# Altium PCB PCB1.PcbDoc
Units mm, origin at the board's own origin, x right, y up, seen from the top; angles counter-clockwise.
Board outline 99.19 x 69.85 mm, 2 copper layers (Top Layer, Bottom Layer); 73 components, 41 nets, 222 pads, 45 vias.
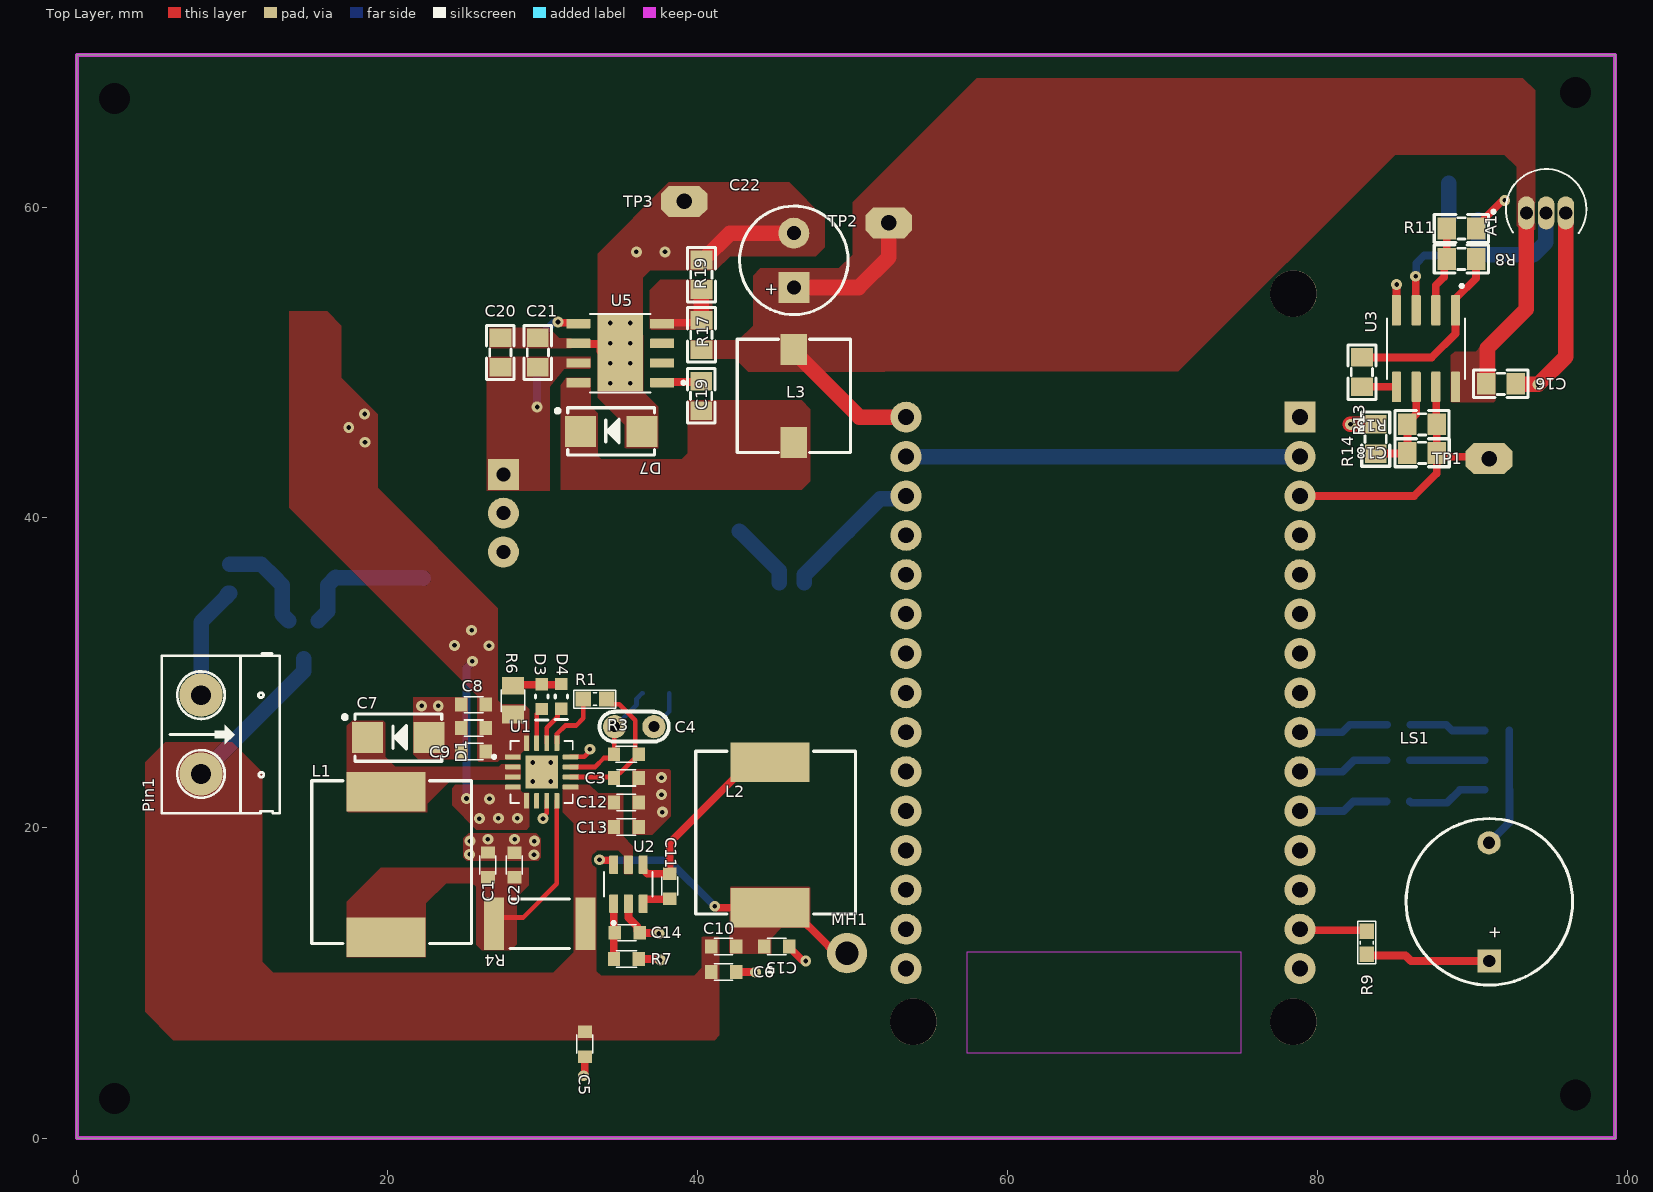
[diagram p0: Top Layer view]
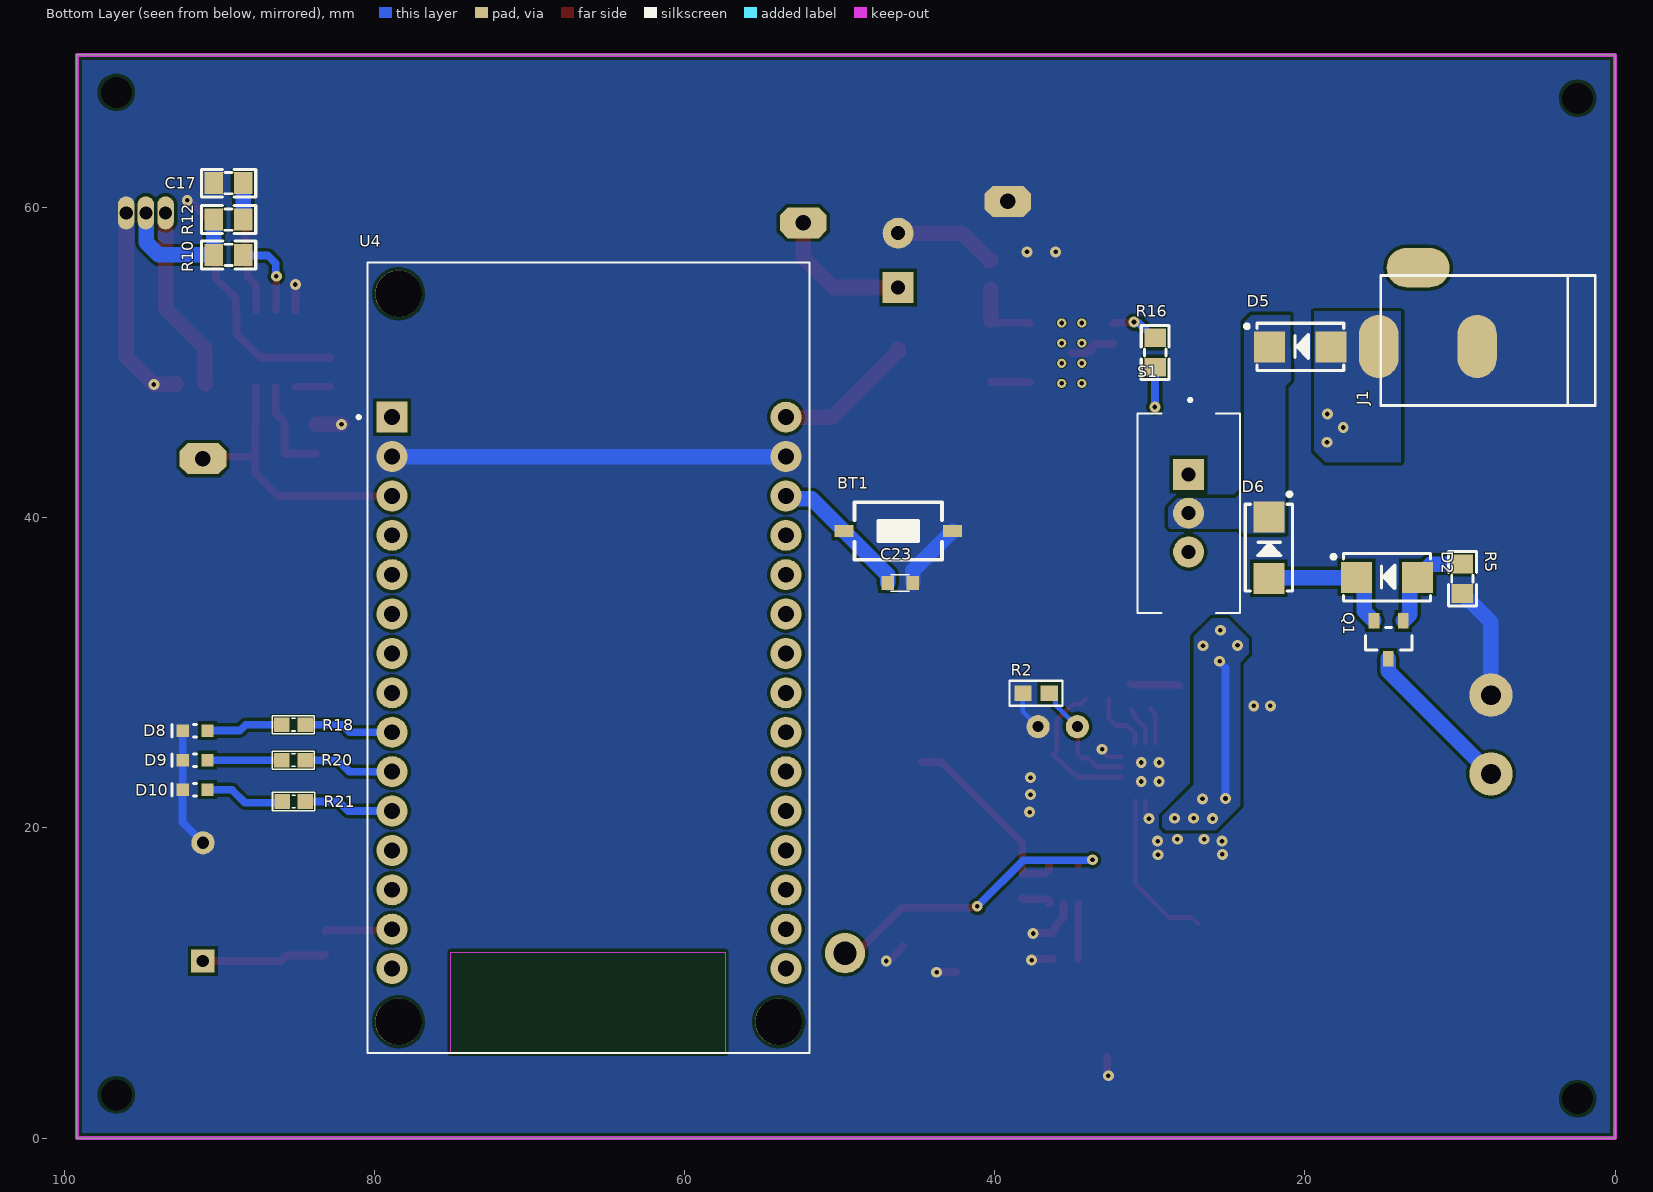
[diagram p1: Bottom Layer view, seen from below]
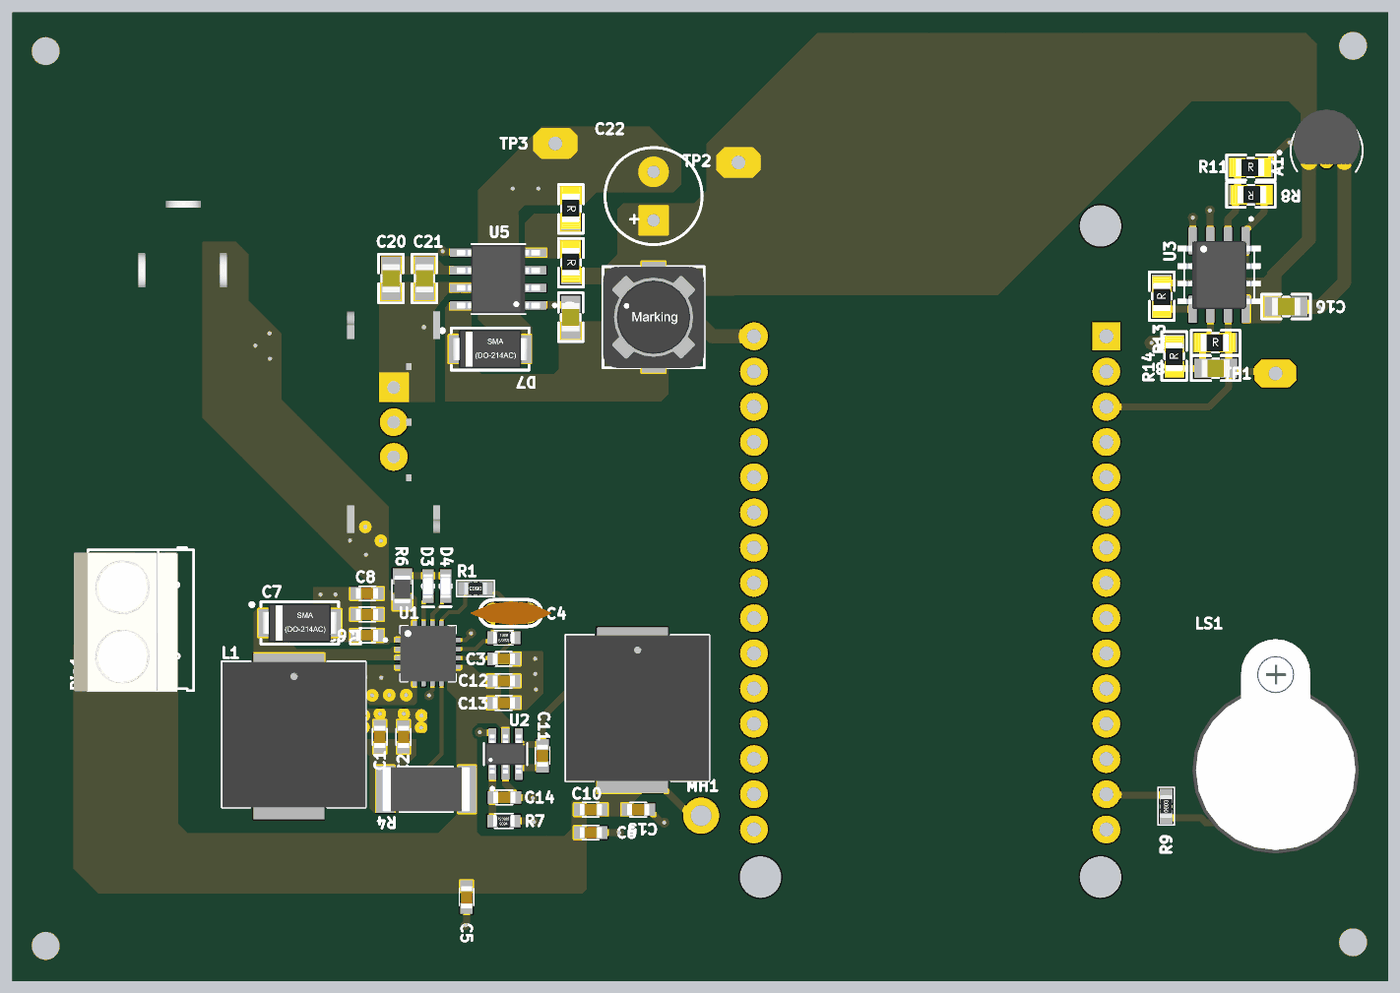
[diagram p2: 3D render of the assembled board from above, using the file's embedded part models]
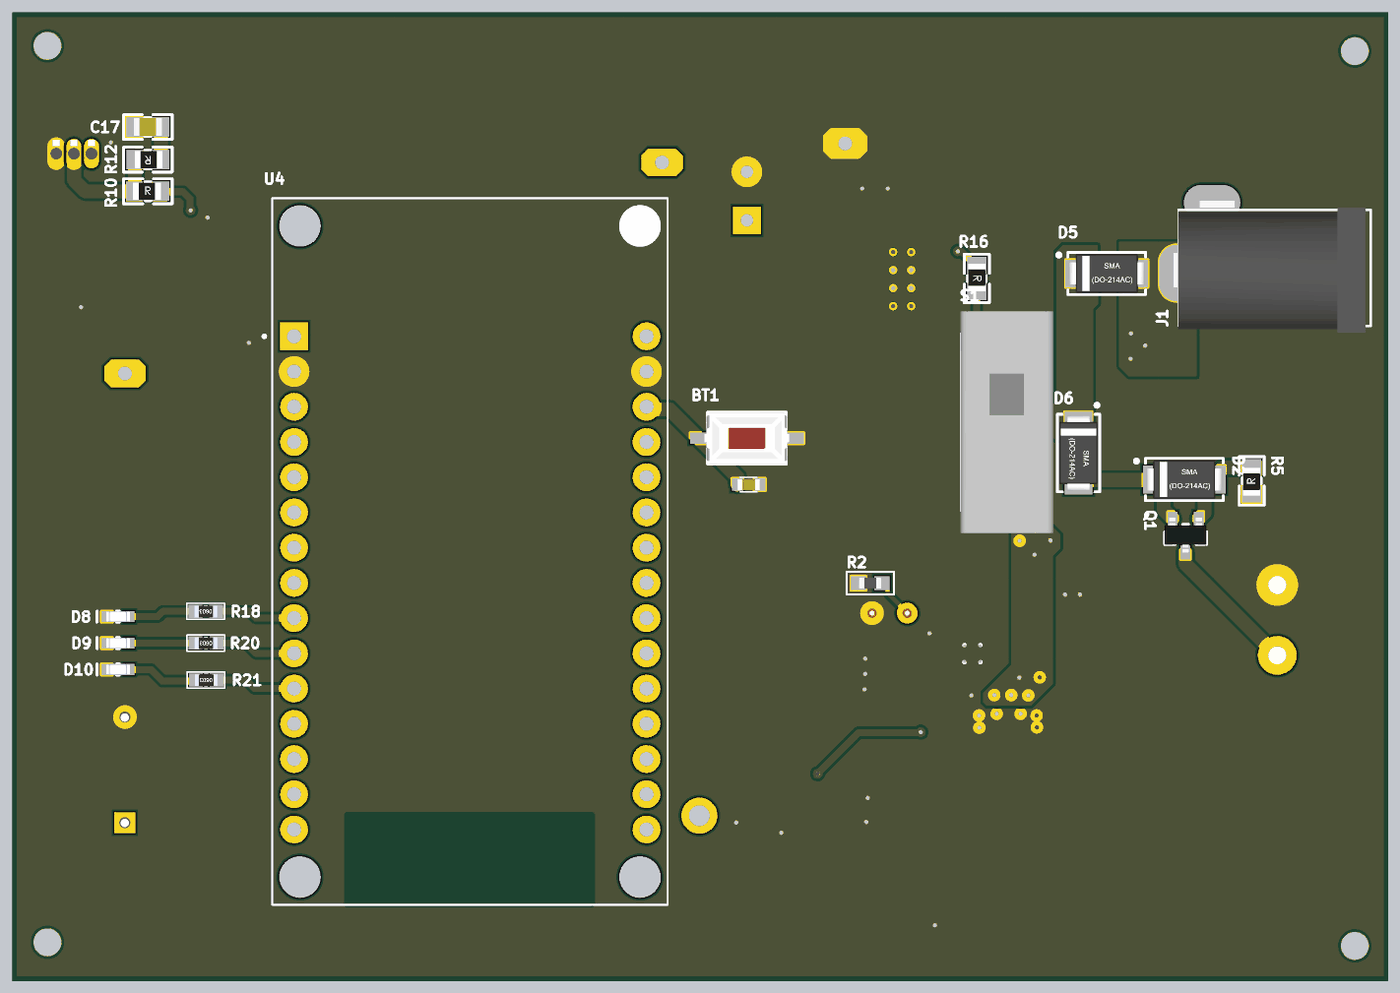
[diagram p3: 3D render of the assembled board from below, using the file's embedded part models]

## Layer stack, top to bottom
Top Solder: solder mask 0.0102, Solder Resist, Dk 3.5
Top Layer: signal copper 0.0356
Dielectric 1: dielectric 0.32, FR-4, Dk 4.8
Bottom Layer: signal copper 0.0356
Bottom Solder: solder mask 0.0102, Solder Resist, Dk 3.5

## Board outline
0,0 0,69.85 99.187,69.85 99.187,0

## Design rules (kind name [scope] priority, off if disabled: settings)
Clearance [All] p1: gap=0.2 ignorepadtopadclearanceinfootprint=TRUE
HoleSize [All] p1: absolutevalues=TRUE maxlimit=5 minlimit=0.3 maxpercent=80.000 minpercent=20.000
HoleToHoleClearance [All] p1: gap=0.1 allowstackedmicrovias=TRUE
MinimumSolderMaskSliver [All] p1: minsoldermaskwidth=0.1
PolygonConnect [All] p1: connectstyle=Direct reliefconductorwidth=0.254 reliefentries=4 polygonreliefangle="90 Angle" airgapwidth=0.254
RoutingVias [All] p1: holewidth=0.3 width=0.7 viastyle="Through Hole" minholewidth=0.1 minwidth=0.7 maxholewidth=1 maxwidth=1.27
SilkToSilkClearance [All] p1: silktosilkclearance=0
SilkToSolderMaskClearance [IsPad] p1: minsilkscreentomaskgap=0 clearancetoexposedcopper=TRUE
SolderMaskExpansion [All] p1: expansion=0.102 istentingtop=FALSE
Width [All] p1: maxlimit=1 minlimit=0.3 preferedwidth=0.5
25 further rules are at their usual default settings.

## Components (designator, comment, footprint, x,y, rotation, side; value= is the part's Value field where it differs from the comment)
A1 "LM35DZ" TO92127P521H735-3 94.742,60.442 r0 top
BT1 "Nut Nhan 2 Chan SMD 3x6x2.5" "Nut Nhan 2 Chan SMD 3x6x2.5" 46.225,39.15 r0 bottom
C1 "100nF" C0603C/1608MM 26.493,17.618 r270 top
C2 "10uF" C0603C/1608MM 28.204,17.612 r270 top
C3 "100nF" C0603C/1608MM 35.433,23.231 r180 top
C4 "203" "tu gom" 35.941,26.533 r0 top
C5 "100nF" C0603C/1608MM 32.75,6.05 r90 top
C6 "10uF" C0603C/1608MM 41.704,10.71 r180 top
C7 "10uF" C0603C/1608MM 25.575,27.95 r0 top
C8 "1uF" C0603C/1608MM 25.575,26.438 r0 top
C9 "100nF" C0603C/1608MM 25.575,24.925 r0 top
C10 "10uF" C0603C/1608MM 41.704,12.361 r180 top
C11 "10nF" C0603C/1608MM 38.227,16.246 r90 top
C12 "10uF" C0603C/1608MM 35.433,21.64 r180 top
C13 "10uF" C0603C/1608MM 35.433,20.056 r180 top
C14 "1nF" C0603C/1608MM 35.481,13.245 r180 top
C15 "10uF" C0603C/1608MM 45.133,12.361 r180 top
C16 "0.1uF" "tu 0805" 91.821,48.641 r0 top
C17 "0.2uF" "tu 0805" 89.408,61.585 r0 bottom
C18 "0.2uF" "tu 0805" 86.741,44.186 r0 top
C19 "0.01uF" "tu 0805" 40.259,47.869 r270 top
C20 "1uF" "tu 0805" 27.305,50.663 r90 top
C21 "10uF" "tu 0805" 29.718,50.663 r90 top
C22 "220uF/63V" CAP_ALUM_D070_S35_H115 46.228,56.604 r90 top
C23 "100nF" C0603C/1608MM 46.101,35.804 r0 bottom
D1 "SS34" "SMA (DO-214AC)" 20.825,25.725 r180 top
D2 "SS34" "SMA (DO-214AC)" 14.605,36.068 r0 bottom
D3 "Orange" LED_0603_0m65 29.975,28.475 r90 top
D4 "Orange" LED_0603_0m65 31.242,28.484 r90 top
D5 "SS34" "SMA (DO-214AC)" 20.193,50.927 r0 bottom
D6 "SS34" "SMA (DO-214AC)" 22.425,37.975 r90 bottom
D7 "SS34" "SMA (DO-214AC)" 34.55,45.475 r180 top
D8 "Orange" LED_0603_0m65 91.567,26.279 r180 bottom
D9 "Orange" LED_0603_0m65 91.567,24.374 r180 bottom
D10 "Orange" LED_0603_0m65 91.567,22.469 r180 bottom
J1 "DCIN" DC0_SMD 12.065,53.594 r0 bottom
L1 "22uH" "IND 22uH" 19.939,17.643 r270 top
L2 "1uH" "IND 22uH" 44.704,19.548 r270 top
L3 "15uH" L-SMD-M-7.3x4.5 46.228,47.869 r180 top
LS1 "Coi Chip Speaker" "Coi Chip Speacker" 91.072,11.42 r90 top
MH1 "MH_3MMD_1.5MMH" MH_3MMD_1.5MMH 49.657,11.928 r90 top
Pin1 "Header 2" HED2 8.001,28.565 r270 top
Q1 "AO3401" "SOT 23" 14.605,32.131 r270 bottom
R1 "10K" "tro smd 0603" 33.401,28.311 r180 top
R2 "10K" "RESC-0603 (1608)" 37.338,28.692 r0 bottom
R3 "5.6K" R0603B/1608MM 35.433,24.755 r0 top
R4 "0.1R" R2512B/6332MM 29.845,13.833 r180 top
R5 "3.24K" "tro smd 0805" 9.906,36.068 r90 bottom
R6 "1K" R0805B/2012MM 28.125,28.25 r270 top
R7 "50k" R0603B/1608MM 35.433,11.547 r180 top
R8 "20K" "tro smd 0805" 89.281,56.632 r180 top
R9 "1k" "tro smd 0603" 83.175,12.6 r90 top
R10 "20K" "tro smd 0805" 89.408,57.013 r180 bottom
R11 "20K" "tro smd 0805" 89.281,58.725 r0 top
R12 "75R" "tro smd 0805" 89.408,59.172 r0 bottom
R13 "20K" "tro smd 0805" 82.804,49.393 r90 top
R14 "20K" "tro smd 0805" 83.693,45.075 r90 top
R15 "40K" "tro smd 0805" 86.741,46.091 r0 top
R16 "10k" "tro smd 0805" 29.591,50.663 r270 bottom
R17 "10k" "tro smd 0805" 40.335,51.806 r270 top
R18 "1K" "tro smd 0603" 85.229,26.66 r0 bottom
R19 "3.24k" "tro smd 0805" 40.335,55.681 r270 top
R20 "1K" "tro smd 0603" 85.217,24.374 r0 bottom
R21 "1K" "tro smd 0603" 85.205,21.707 r0 bottom
S1 "500SSP1S2M2QEA" SW_500SSP1S2M2QEA 27.5,40.3 r270 bottom
TP1 "Testpoint 2" "TP - 2" 91.059,43.815 r0 top
TP2 "Testpoint 2" "TP - 2" 52.35,59.025 r0 top
TP3 "Testpoint 2" "TP - 2" 39.15,60.4 r0 top
U1 "TP5100" QFN65P400X400X90-17N 29.972,23.612 r0 top
U2 "ETA3000" ETA300 35.56,16.373 r90 top
U3 "LM358DRE4" SOIC127P599X175-8N 86.995,50.917 r270 top
U4 "ESP32-DEVKIT-V1" MODULE_ESP32_DEVKIT_V1 66.167,30.978 r180 bottom
U5 "TPS5430DDAR" CONV_TPS5430DDAR 35.037,50.618 r180 top

## Footprints (in the part's own frame and the unit in brackets; to place one, negate y for a bottom-side part, rotate by r counter-clockwise, add the part's x,y. Pads: shape width x height; smd on the part's side, far side on the other; paste and mask are expansions set on the pad)
C0603C/1608MM [mm] "Chip Capacitor, 2-Leads, Body 1.6x0.8mm, IPC High Density"
  rect 0.8x0.9 smd: 1(-0.8,0) 2(0.8,0)
  silkscreen extent -0.59,-0.53 0.61,0.53, body extent -0.8,-0.4 0.8,0.4, height 0.9
CAP_ALUM_D070_S35_H115 [mm]
  rect 2x2 hole 0.9: 1(-1.75,0)
  round 2 hole 0.9: 2(1.75,0)
  silkscreen extent -3.5,-3.5 3.5,3.5, body extent -4.25,-4.25 4.25,4.25, height 13
"Coi Chip Speacker" [mm]
  rect 1.5x1.5 hole 0.8: 1(0,0)
  round 1.5 hole 0.8: 2(7.62,0.013)
  silkscreen extent -1.55,-5.38 9.18,5.36, body extent -2.22,-6 13.24,6, height 4.5
CONV_TPS5430DDAR [mm]
  rrect10% 1.55x0.6 smd mask+0: 1(-2.7,1.905) 2(-2.7,0.635) 3(-2.7,-0.635) 4(-2.7,-1.905) 5(2.7,-1.905) 6(2.7,-0.635) 7(2.7,0.635) 8(2.7,1.905)
  rect 2.95x4.9 smd paste-3 mask+0: 9(0,0)
  round 0.6 hole 0.3 mask+0: 10(-0.65,1.95) 11(0.65,1.95) 12(-0.65,0.65) 13(0.65,0.65) 14(-0.65,-0.65) 15(0.65,-0.65) 16(-0.65,-1.95) 17(0.65,-1.95)
  silkscreen extent -4.17,-2.52 1.95,2.52, body extent -3,-2.45 3,2.45, height 1.7
DC0_SMD [mil] "Jac DC input"
  oval 100x160 smd: 1(125,100) 2(-125,100)
  oval 160x100 smd: 3(25,-100)
  silkscreen extent -425,-80 120,250, body extent -410,-105 134,269, height 434
ETA300 [mm]
  rrect25% 1.21x0.58 smd: 1(-1.255,0.95) 2(-1.255,0) 3(-1.255,-0.95) 4(1.255,-0.95) 5(1.255,0) 6(1.255,0.95)
  silkscreen extent -2.6,-1.56 0.8,1.56, body extent -1.4,-1.45 1.4,1.45, height 1.45
HED2 [mil]
  round 110 hole 50: 1(0,0) 2(200,0)
  silkscreen extent -106,-100 300,200, body extent -92,-140 302,155, height 394
"IND 22uH" [mm]
  rect 2.54x5.1 smd: 1(-4.7,0) 2(4.7,0)
  silkscreen extent -5.4,-4.8 5.1,5.5, body extent -5.37,-4.77 5.12,5.54, height 5.01
L-SMD-M-7.3x4.5 [mm]
  rect 1.7x2 smd: 1(0,3) 2(0,-3)
  silkscreen extent -3.65,-3.65 3.65,3.65, body extent -3.65,-3.65 3.65,3.65, height 4.05
LED_0603_0m65 [mm]
  rect 0.8x0.8 smd: 1(0.8,0) 2(-0.8,0)
  silkscreen extent -1.5,-0.4 0.1,0.4, body extent -0.85,-0.4 0.85,0.4, height 0.66
MH_3MMD_1.5MMH [mm]
  round 2.6 hole 1.5: 1(0,0)
MODULE_ESP32_DEVKIT_V1 [mm]
  rect 2x2 / inner round 2 / far side rect 2x2 hole 1.02: 1(-12.7,15.515)
  round 2 hole 1.02: 2(-12.7,12.975) 3(-12.7,10.435) 4(-12.7,7.895) 5(-12.7,5.355) 6(-12.7,2.815) 7(-12.7,0.275) 8(-12.7,-2.265) 9(-12.7,-4.805) 10(-12.7,-7.345) 11(-12.7,-9.885) 12(-12.7,-12.425) 13(-12.7,-14.965) 14(-12.7,-17.505) 15(-12.7,-20.045) 16(12.7,-20.045) 17(12.7,-17.505) 18(12.7,-14.965) 19(12.7,-12.425) 20(12.7,-9.885) 21(12.7,-7.345) 22(12.7,-4.805) 23(12.7,-2.265) 24(12.7,0.275) 25(12.7,2.815) 26(12.7,5.355) 27(12.7,7.895) 28(12.7,10.435) 29(12.7,12.975) 30(12.7,15.515)
  round 3 hole 3 unplated: ""(-12.28,-23.475) ""(-12.28,23.475) ""(12.23,-23.475)
  round 3 on Bottom Overlay: ""(12.23,23.475)
  Keep-Out Layer region: 8.78,-25.475 -8.91,-25.475 -8.91,-18.985 8.78,-18.985
  Keep-Out Layer region: 8.78,-25.475 -8.91,-25.475 -8.91,-18.985 8.78,-18.985
  silkscreen extent -14.95,-25.48 14.23,25.48
"Nut Nhan 2 Chan SMD 3x6x2.5" [mm] "Switch SMD type"
  rect 1.2x0.8 smd: 1(-3.5,0) 2(3.5,0)
  silkscreen extent -2.82,-1.85 2.82,1.85, body extent -3.05,-1.85 3.05,1.85, height 2.5
QFN65P400X400X90-17N [mm]
  rrect25% 1.01x0.32 smd: 1(-1.86,0.975) 2(-1.86,0.325) 3(-1.86,-0.325) 4(-1.86,-0.975) 9(1.86,-0.975) 10(1.86,-0.325) 11(1.86,0.325) 12(1.86,0.975)
  rrect25% 0.32x1.01 smd: 5(-0.975,-1.86) 6(-0.325,-1.86) 7(0.325,-1.86) 8(0.975,-1.86) 13(0.975,1.86) 14(0.325,1.86) 15(-0.325,1.86) 16(-0.975,1.86)
  rect 2.1x2.1 smd paste-0.39: 17(0,0)
  silkscreen extent -3.17,-2 2,2, body extent -2,-2 2,2, height 0.9
R0603B/1608MM [mm] "Chip Resistor, 2-Leads, Body 1.6x0.8mm, IPC High Density"
  rect 0.8x0.9 smd: 1(-0.8,0) 2(0.8,0)
  silkscreen extent -0.67,-0.53 0.67,0.53, body extent -0.77,-0.42 0.78,0.43, height 0.46
R0805B/2012MM [mm] "Chip Resistor, 2-Leads, Body 2.0x1.3mm, IPC Medium Density"
  rect 1.15x1.4 smd: 1(-0.925,0) 2(0.925,0)
  silkscreen extent -0.67,-0.75 0.76,0.75, body extent -1,-0.6 1,0.6, height 0.6
R2512B/6332MM [mm] "Chip Resistor, 2-Leads, Body 6.3x3.2mm, IPC Medium Density"
  rect 1.3x3.4 smd: 1(-2.95,0) 2(2.95,0)
  silkscreen extent -1.9,-1.6 1.9,1.6, body extent -3.15,-1.6 3.15,1.6, height 0.7
"RESC-0603 (1608)" [mm] "Resistor, Chip; 1.60 mm L X 0.80 mm W X 0.50 mm H body"
  rect 1.1x1 smd mask+0.1: 1(-0.85,0) 2(0.85,0)
  silkscreen extent -1.71,-0.81 1.71,0.81, body extent -0.8,-0.4 0.8,0.4, height 0.5
"SMA (DO-214AC)" [mm] "Molded Diode, 2-Leads, Body 5.3x2.8mm, IPC Medium Density"
  rect 2x2 smd: 1(-1.875,-0.1) 2(2.075,-0.1)
  silkscreen extent -2.7,-1.62 3.67,1.42, body extent -2.65,-1.5 2.85,1.3, height 2.6
SOIC127P599X175-8N [mm]
  rrect25% 1.97x0.6 smd: 1(-2.47,1.905) 2(-2.47,0.635) 3(-2.47,-0.635) 4(-2.47,-1.905) 5(2.47,-1.905) 6(2.47,-0.635) 7(2.47,0.635) 8(2.47,1.905)
  silkscreen extent -4.14,-2.52 1.95,2.52, body extent -2.45,-3 2.45,3, height 1.75
"SOT 23" [mm]
  rect 1x0.7 smd: 1(-1.225,0.945) 2(-1.22,-0.945) 3(1.225,-0.025)
  silkscreen extent -0.8,-1.5 0.65,1.5, body extent -1.28,-1.51 1.22,1.49, height 1.06
SW_500SSP1S2M2QEA [mm]
  rect 2x2 hole 0.9: 1(-2.5,0)
  round 2 hole 0.9: 2(0,0) 3(2.5,0)
  silkscreen extent -7.4,-3.3 6.43,3.3, body extent -8,-3.35 8,3.35, height 11.5
TO92127P521H735-3 [mm]
  oval 1.07x2.14 hole 0.85: 1(-1.27,-0.775) 2(0,-0.775) 3(1.27,-0.775)
  silkscreen extent -3.5,-2.08 2.6,2.04, body extent -2.4,-1.53 2.4,2.4, height 7.74
"TP - 2" [mm]
  oct 3x2 hole 1: 1(0,0)
"tro smd 0603" [mm] "Chip Capacitor, 2-Leads, Body 1,60x0,80mm, IPC Medium Density"
  rect 1x0.95 smd mask+0.076: 1(-0.75,0) 2(0.75,0)
  silkscreen extent -1.35,-0.58 1.37,0.58, body extent -0.82,-0.42 0.82,0.43, height 0.44
"tro smd 0805" [mm]
  rect 1.2x1.4 smd: 1(-0.946,-0.061) 2(0.954,-0.061)
  silkscreen extent -1.75,-0.97 1.75,0.84, body extent -1.56,-0.76 1.44,0.64, height 0.53
"tu 0805" [mm] "Compoment SMD 80x50mil"
  rect 1.2x1.4 smd: 1(-0.946,-0.003) 2(0.954,-0.003)
  silkscreen extent -1.75,-0.89 1.75,0.89, body extent -1.01,-0.64 1.01,0.63, height 0.61
"tu gom" [mm] "Tu gom mini"
  round 1.5 hole 0.7: 1(-1.27,0) 2(1.27,0)
  silkscreen extent -2.25,-0.97 2.22,0.97, body extent -2.92,-0.85 2.92,0.85, height 6.12

## Part data
A1: library part LM35DZ/NOPB, "Temperature Sensor Analog, Local 0Â°C ~ 100Â°C 10mV/Â°C TO-92-3", Package="E-PKG AXIAL-LEADED-2 ON Semiconductor", Availability="In Stock", Check_prices=https://www.snapeda.com/parts/LM35DZ/Texas+Instruments/view-part/?ref=eda, MF="Texas Instruments", MP=LM35DZ, Price=None, Purchase-URL=https://pricing.snapeda.com/search/part/LM35DZ/?ref=eda, SnapEDA_Link=https://www.snapeda.com/parts/LM35DZ/Texas+Instruments/view-part/?ref=snap
C1 C3 C5 C9 C23: library part "CAP CER 100nF 16V 5% X7R 0603", "Cap Ceramic 0.1uF 16V X7R 5% SMD 0603 125C T/R", Case Code (Imperial)=0603, Case Code (Metric)=1608, Dielectric=X7R, Manufacturer=Yageo, Manufacturer Part Number=CC0603JRX7R7BB104, Max Operating Temperature=125°C, Min Operating Temperature=-55°C, Supplier Part Number 1=311-1776-1-ND, Tolerance=5%, Voltage Rating=16V, Capacitance=100nF, Case/Package=0603, ComponentLink1Description=https://www.verical.com/server-webapp/html/getDatasheet?partID=403543&src-supplier=Verical, ComponentLink1URL=https://www.verical.com/server-webapp/html/getDatasheet?partID=403543&src-supplier=Verical, Depth=0.8mm, Halogen Free="Halogen Free", Lead Free="Lead Free", Length=1.6mm, Mount="Surface Mount", Number of Pins=2, Packaging="Tape and Reel", Pricing 1="1=0.1, 10=0.077, 50=0.042, 100=0.0343, 500=0.02448, 1000=0.01923 (USD)", Radiation Hardening=No, RoHS Compliant=Yes, Series=CC, Stock 1=333951, Supplier 1=Digi-Key, Thickness=0.035inch, Voltage Rating (DC)=16V, Width=0.031inch
C2 C6 C7 C8 C10 C12 C13 C15: library part "CAP CER 10uF 16V X7R 0603", "CAP CER 0603 10uF 16V X7R 10%"
C4: library part "Tu gom 203 50V", "Cắm", Chung_Loai=Cắm, Don_Vi=Con, Ma_Hang=MH007482, So_Chan=2, Ten_Linh_Kien="Tụ gốm 203 -20nF 50V"
C11: library part "CAP CER 10nF 16V X7R 0603", "CAP CER 0603 10NF 16V X7R 10%", Case Code (Imperial)=0603, Case Code (Metric)=1608, Manufacturer=KEMET, Manufacturer Part Number=C0603C103K4RECAUTO, Max Operating Temperature=125°C, Min Operating Temperature=-55°C, Ratings=AEC-Q200, Supplier Part Number 1=399-17880-1-ND, Tolerance=10%, Voltage Rating=16V, Capacitance=10nF, Case/Package=0603, ComponentLink1Description=https://api.kemet.com/component-edge/download/datasheet/C0603C103K4RECAUTO.pdf?src-supplier=Digi-Key, ComponentLink1URL=https://api.kemet.com/component-edge/download/datasheet/C0603C103K4RECAUTO.pdf?src-supplier=Digi-Key, Mount="Surface Mount", Packaging="Tape and Reel", Pricing 1="1=0.15, 10=0.11, 50=0.0624, 100=0.0517, 500=0.03624, 1000=0.03 (USD)", RoHS Compliant=Yes, Stock 1=50866, Supplier 1=Digi-Key
C14: library part "CAP CER 1nF 16V 5% X7R 0603", "1000 pF ±5% 16V Ceramic Capacitor X7R 0603 (1608 Metric)", Case Code (Imperial)=0603, Case Code (Metric)=1608, Manufacturer=KEMET, Manufacturer Part Number=C0603X102J4RECAUTO, Max Operating Temperature=125°C, Min Operating Temperature=-55°C, Ratings=AEC-Q200, Supplier Part Number 1=399-17840-1-ND, Tolerance=5%, Voltage Rating=16V, Capacitance=1nF, Case/Package=0603, ComponentLink1Description=http://www.farnell.com/datasheets/2743686.pdf?src-supplier=Newark, ComponentLink1URL=http://www.farnell.com/datasheets/2743686.pdf?src-supplier=Newark, ComponentLink2Description=http://www.farnell.com/datasheets/2743686.pdf?src-supplier=Farnell, ComponentLink2URL=http://www.farnell.com/datasheets/2743686.pdf?src-supplier=Farnell, ComponentLink3Description=https://api.kemet.com/component-edge/download/datasheet/C0603X102J4RECAUTO.pdf?src-supplier=Digi-Key, ComponentLink3URL=https://api.kemet.com/component-edge/download/datasheet/C0603X102J4RECAUTO.pdf?src-supplier=Digi-Key, Features="Soft Termination", Mount="Surface Mount", Packaging="Tape and Reel", Pricing 1="1=0.22, 10=0.147, 50=0.0882, 100=0.0744, 500=0.0509, 1000=0.04503 (USD)", RoHS Compliant=Yes, Stock 1=2638, Supplier 1=Digi-Key
C16 C17 C18 C19 C20 C21: library part "Tu 0805 10pF 50V 10%", "Dán", Chung_Loai=Dán, Don_Vi=Con, Ma_Hang=MH004554, So_Chan=2, Ten_Linh_Kien="Tụ 0805 10P 10% 50V"
C22: library part "CAP ALUM 47UF 20% 63V RADIAL", "Cap Aluminum 47uF 63V 20% (8 X 11.5mm) Radial 3.5mm 405mA 3000 hr 105C Ammo Pack", Capacitance=47uF, Case/Package=Radial, Dielectric Material=Aluminium, ESR (Equivalent Series Resistance)=684mR, Manufacturer=Nichicon, Manufacturer Part Number=UPW1J470MPD1TD, Max Operating Temperature=105°C, Min Operating Temperature=-55°C, Package Quantity=1000, Ripple Current=405mA, Supplier Part Number 1=493-11607-1-ND, Tolerance=20%, Voltage Rating=63V, ComponentLink1Description=https://datasheet.ciiva.com/7907/e-pw-7907438.pdf?src-supplier=Element14, ComponentLink1URL=https://datasheet.ciiva.com/7907/e-pw-7907438.pdf?src-supplier=Element14, ComponentLink2Description=https://datasheet.ciiva.com/46391/1909381-46391130.pdf?src-supplier=Element14, ComponentLink2URL=https://datasheet.ciiva.com/46391/1909381-46391130.pdf?src-supplier=Element14, ComponentLink3Description=https://datasheet.ciiva.com/29546/e-pw-29546670.pdf?src-supplier=Digi-Key, ComponentLink3URL=https://datasheet.ciiva.com/29546/e-pw-29546670.pdf?src-supplier=Digi-Key, ComponentLink4Description=https://datasheet.ciiva.com/29546/e-pw-29546669.pdf?src-supplier=Digi-Key, ComponentLink4URL=https://datasheet.ciiva.com/29546/e-pw-29546669.pdf?src-supplier=Digi-Key, ComponentLink5Description=https://datasheet.ciiva.com/16502/e-pw-16502651.pdf?src-supplier=Future+Electronics, ComponentLink5URL=https://datasheet.ciiva.com/16502/e-pw-16502651.pdf?src-supplier=Future+Electronics, Diameter=8mm, Height=11.5mm, Height - Seated (Max)=0.512inch, Impedance=342mR, Lead Free="Lead Free", Lead Pitch=3.5mm, Life (Hours)=3000Hour, Mount="Through Hole", Packaging="Tape and Reel", Pricing 1="1=0.45, 10=0.321, 50=0.2424, 100=0.2111, 500=0.15634 (USD)", Radiation Hardening=No, Reach SVHC Compliant=Yes, RoHS Compliant=Yes, Series=UPW, Stock 1=26935, Supplier 1=Digi-Key, Termination=Radial, Voltage Rating (DC)=63V
D1 D2 D5 D6 D7: library part "DIODE SCHOTTKY 40V 3A SMC", "SS Series 500 mV 3 A 40 V Max Reverse Voltage Schottky Rectifier - DO-214AB", Case/Package=SMC, Current Rating=3A, Manufacturer="Taiwan Semiconductor", Max Operating Temperature=125°C, Max Repetitive Reverse Voltage (Vrrm)=40V, Max Reverse Current=500uA, Max Surge Current=100A, Min Operating Temperature=-55°C, Package Quantity=3000, Supplier Part Number 1=1801-SS34TR-ND, ComponentLink1Description=http://datasheet.octopart.com/SS34-Taiwan-Semiconductor-datasheet-34355611.pdf?src-supplier=Digi-Key, ComponentLink1URL=http://datasheet.octopart.com/SS34-Taiwan-Semiconductor-datasheet-34355611.pdf?src-supplier=Digi-Key, ComponentLink2Description=https://datasheet.octopart.com/SS34-Taiwan-Semiconductor-datasheet-13721713.pdf?src-supplier=Farnell, ComponentLink2URL=https://datasheet.octopart.com/SS34-Taiwan-Semiconductor-datasheet-13721713.pdf?src-supplier=Farnell, ComponentLink3Description=https://datasheet.octopart.com/SS34-Taiwan-Semiconductor-datasheet-68472394.pdf?src-supplier=Element14, ComponentLink3URL=https://datasheet.octopart.com/SS34-Taiwan-Semiconductor-datasheet-68472394.pdf?src-supplier=Element14, ComponentLink4Description=https://datasheet.octopart.com/SS34-Taiwan-Semiconductor-datasheet-8823.pdf?src-supplier=Mouser, ComponentLink4URL=https://datasheet.octopart.com/SS34-Taiwan-Semiconductor-datasheet-8823.pdf?src-supplier=Mouser, ComponentLink5Description=http://datasheet.octopart.com/SS34-Taiwan-Semiconductor-datasheet-34355611.pdf?src-supplier=Avnet, ComponentLink5URL=http://datasheet.octopart.com/SS34-Taiwan-Semiconductor-datasheet-34355611.pdf?src-supplier=Avnet, ComponentLink6Description=http://datasheet.octopart.com/SS34-Taiwan-Semiconductor-datasheet-34355611.pdf?src-supplier=Onlinecomponents.com, ComponentLink6URL=http://datasheet.octopart.com/SS34-Taiwan-Semiconductor-datasheet-34355611.pdf?src-supplier=Onlinecomponents.com, Element Configuration=Single, Forward Current=3A, Lead Free="Lead Free", Manufacturer Part Number=SS34, Max Reverse Leakage Current=500uA, Mount="Surface Mount", Number of Pins=2, Output Current=3A, Packaging="Tape and Reel", Peak Non-Repetitive Surge Current=100A, Polarity=Standard, Pricing 1="3000=0.20021, 6000=0.18729, 15000=0.1863 (USD)", Reach SVHC Compliant=Yes, RoHS Compliant=Yes, Stock 1=0, Supplier 1=Digi-Key, Voltage Rating (DC)=40V
D3 D4 D8 D10: library part "LED ORANGE 606NM 0603", "LED SMARTLED ORANGE 606NM 0603", Current - Test=2mA, Luminous Flux @ Current - Test="25 mlm", Manufacturer="OSRAM Opto Semiconductors Inc", Manufacturer Part Number="LO L29K-H2K1-24-Z", Millicandela Rating=6.3mcd, Package / Case=LED_0603, Supplier Part Number 1=475-2740-1-ND, Voltage - Forward (Vf) Typ=1.8V, By=Hieu.Nguyen_20191030, Category=Optoelectronics, Color=Orange, ComponentLink1Description=http://catalog.osram-os.com/catalogue/catalogue.do;jsessionid=302CF83AF637AE24E40AEB0ADA267EDD?act=downloadFile&favOid=020000010003f9de000100b6, ComponentLink1URL=http://catalog.osram-os.com/catalogue/catalogue.do;jsessionid=302CF83AF637AE24E40AEB0ADA267EDD?act=downloadFile&favOid=020000010003f9de000100b6, Height=0.65mm, Lens Style/Size="Rectangle with Flat Top, 1.3mm x 0.8mm", Lens Type=Diffused, Mounting Type="Surface Mount", Packaging="Cut Tape (CT)", Pricing 1="1=0.17, 10=0.141, 100=0.1127, 250=0.0986, 500=0.09016 (USD)", RoHS="RoHS Compliant", Size / Dimension="1.70mm L x 0.80mm W", Stock 1=15900, Supplier 1=Digi-Key, Viewing Angle=160°, Wavelength - Dominant=606nm, Wavelength - Peak=610nm
D9: library part "LED ORANGE 606NM 0603", "LED SMARTLED ORANGE 606NM 0603", Current - Test=2mA, Luminous Flux @ Current - Test="25 mlm", Manufacturer="OSRAM Opto Semiconductors Inc", Manufacturer Part Number="LO L29K-H2K1-24-Z", Millicandela Rating=6.3mcd, Supplier Part Number 1=475-2740-1-ND, Voltage - Forward (Vf) Typ=1.8V, By=Hieu.Nguyen_20191030, Category=Optoelectronics, Color=Orange, ComponentLink1Description=http://catalog.osram-os.com/catalogue/catalogue.do;jsessionid=302CF83AF637AE24E40AEB0ADA267EDD?act=downloadFile&favOid=020000010003f9de000100b6, ComponentLink1URL=http://catalog.osram-os.com/catalogue/catalogue.do;jsessionid=302CF83AF637AE24E40AEB0ADA267EDD?act=downloadFile&favOid=020000010003f9de000100b6, Height=0.65mm, Lens Style/Size="Rectangle with Flat Top, 1.3mm x 0.8mm", Lens Type=Diffused, Mounting Type="Surface Mount", Packaging="Cut Tape (CT)", Pricing 1="1=0.17, 10=0.141, 100=0.1127, 250=0.0986, 500=0.09016 (USD)", RoHS="RoHS Compliant", Size / Dimension="1.70mm L x 0.80mm W", Stock 1=15900, Supplier 1=Digi-Key, Viewing Angle=160°, Wavelength - Dominant=606nm, Wavelength - Peak=610nm
J1: "CONN POWER JACK 2.1X5.5MM SMD"
L1: library part "IND FIXED 22UH 3A 50 MOHM SMD CD104-220 10x10x4mm", "Inductor Power Shielded Wirewound 22uH 20% 100KHz Ferrite 3A 0.05Ohm DCR Automotive T/R", Case/Package=Nonstandard, Current Rating=3A, DC Resistance (DCR)=50mR, Inductance Tolerance=20%, Manufacturer="Wurth Electronics", Manufacturer Part Number=7447714220, Max Operating Temperature=125°C, Min Operating Temperature=-40°C, Package Quantity=1, Ratings=AEC-Q200, Resistor Type=Wirewound, Saturation Current=3.6A, Self Resonant Frequency=14.5MHz, Supplier Part Number 1=732-2992-1-ND, Test Frequency=100kHz, ComponentLink1Description=https://datasheet.ciiva.com/13320/7447714220-70113-13320863.pdf?src-supplier=Mouser, ComponentLink1URL=https://datasheet.ciiva.com/13320/7447714220-70113-13320863.pdf?src-supplier=Mouser, ComponentLink2Description=https://datasheet.ciiva.com/1058/7447714220-1058608.pdf?src-supplier=Digi-Key, ComponentLink2URL=https://datasheet.ciiva.com/1058/7447714220-1058608.pdf?src-supplier=Digi-Key, ComponentLink3Description=https://datasheet.ciiva.com/30489/0900766b81281c0b-30489748.pdf?src-supplier=Rs, ComponentLink3URL=https://datasheet.ciiva.com/30489/0900766b81281c0b-30489748.pdf?src-supplier=Rs, ComponentLink4Description=https://datasheet.ciiva.com/7691/1736273-7691674.pdf?src-supplier=Element14, ComponentLink4URL=https://datasheet.ciiva.com/7691/1736273-7691674.pdf?src-supplier=Element14, ComponentLink5Description=https://datasheet.ciiva.com/1058/7447714220-1058609.pdf?src-supplier=Digi-Key, ComponentLink5URL=https://datasheet.ciiva.com/1058/7447714220-1058609.pdf?src-supplier=Digi-Key, ComponentLink6Description=https://datasheet.ciiva.com/48691/001087798-da-01-ml-we-pd-smd-speicherdrossel-74477142-de-en-48691509.pdf?src-supplier=Conrad, ComponentLink6URL=https://datasheet.ciiva.com/48691/001087798-da-01-ml-we-pd-smd-speicherdrossel-74477142-de-en-48691509.pdf?src-supplier=Conrad, Core Material=Ferrite, Depth=10mm, Height=5mm, Height - Seated (Max)=0.197inch, Inductance=22uH, Length=10mm, Max DC Current=3A, Mount="Surface Mount", Packaging="Tape and Reel", Pricing 1="1=2.26, 10=2.172, 50=1.961, 100=1.759, 250=1.61 (USD)", Resistance=50mR, RMS Current (Irms)=3A, RoHS Compliant=Yes, Series=WE-PD, Series Resistance=50mR, Shielding=Shielded, Stock 1=9408, Supplier 1=Digi-Key, Termination=SMD/SMT, Tolerance=20%, Width=10mm
L2: library part "IND FIXED 22UH 3A 50 MOHM SMD CD104-220 10x10x4mm", "Inductor Power Shielded Wirewound 22uH 20% 100KHz Ferrite 3A 0.05Ohm DCR Automotive T/R", Case/Package=Nonstandard, Current Rating=3A, DC Resistance (DCR)=50mR, Inductance=22uH, Inductance Tolerance=20%, Manufacturer="Wurth Electronics", Manufacturer Part Number=7447714220, Max Operating Temperature=125°C, Min Operating Temperature=-40°C, Package Quantity=1, Ratings=AEC-Q200, Resistor Type=Wirewound, Saturation Current=3.6A, Self Resonant Frequency=14.5MHz, Supplier Part Number 1=732-2992-1-ND, Test Frequency=100kHz, ComponentLink1Description=https://datasheet.ciiva.com/13320/7447714220-70113-13320863.pdf?src-supplier=Mouser, ComponentLink1URL=https://datasheet.ciiva.com/13320/7447714220-70113-13320863.pdf?src-supplier=Mouser, ComponentLink2Description=https://datasheet.ciiva.com/1058/7447714220-1058608.pdf?src-supplier=Digi-Key, ComponentLink2URL=https://datasheet.ciiva.com/1058/7447714220-1058608.pdf?src-supplier=Digi-Key, ComponentLink3Description=https://datasheet.ciiva.com/30489/0900766b81281c0b-30489748.pdf?src-supplier=Rs, ComponentLink3URL=https://datasheet.ciiva.com/30489/0900766b81281c0b-30489748.pdf?src-supplier=Rs, ComponentLink4Description=https://datasheet.ciiva.com/7691/1736273-7691674.pdf?src-supplier=Element14, ComponentLink4URL=https://datasheet.ciiva.com/7691/1736273-7691674.pdf?src-supplier=Element14, ComponentLink5Description=https://datasheet.ciiva.com/1058/7447714220-1058609.pdf?src-supplier=Digi-Key, ComponentLink5URL=https://datasheet.ciiva.com/1058/7447714220-1058609.pdf?src-supplier=Digi-Key, ComponentLink6Description=https://datasheet.ciiva.com/48691/001087798-da-01-ml-we-pd-smd-speicherdrossel-74477142-de-en-48691509.pdf?src-supplier=Conrad, ComponentLink6URL=https://datasheet.ciiva.com/48691/001087798-da-01-ml-we-pd-smd-speicherdrossel-74477142-de-en-48691509.pdf?src-supplier=Conrad, Core Material=Ferrite, Depth=10mm, Height=5mm, Height - Seated (Max)=0.197inch, Length=10mm, Max DC Current=3A, Mount="Surface Mount", Packaging="Tape and Reel", Pricing 1="1=2.26, 10=2.172, 50=1.961, 100=1.759, 250=1.61 (USD)", Resistance=50mR, RMS Current (Irms)=3A, RoHS Compliant=Yes, Series=WE-PD, Series Resistance=50mR, Shielding=Shielded, Stock 1=9408, Supplier 1=Digi-Key, Termination=SMD/SMT, Tolerance=20%, Width=10mm
L3: library part L-SMD-1, Inductance="1.0 μH", Manufacturer="Wurth Elektronik", partNo=78477010, ComponentLink1Description=Manufacturer, ComponentLink1URL=http://www.we-online.de, ComponentLink2Description=Datasheet, ComponentLink2URL=http://katalog.we-online.de/pbs/datasheet/78477010.pdf, Created by="Baojun Chen", Created Date=Nov.2015
LS1: "Còi chip"
MH1: "Mounting Hole 3mm Diameter, 1.5mm Hole"
Pin1: library part Hed2, "Header 2 (Green)"
Q1: library part "MOSFET P-CH 30V 4A SOT23-3", "Transistor P-Channel MOSFET; 30V; 4, 2A; 1, 4W; 85 mOhm; -55°C ~ 150°C; ;", Case/Package=TO-236-3, Continuous Drain Current (ID)=4A, Drain to Source Voltage (Vdss)=30V, Input Capacitance=1.2nF, Manufacturer="Alpha & Omega Semiconductor", Manufacturer Part Number=AO3401A, Max Operating Temperature=150°C, Max Power Dissipation=1.4W, Min Operating Temperature=-55°C, Supplier Part Number 1=785-1001-1-ND, ComponentLink1Description=https://datasheet.ciiva.com/940/ao3401a-940720.pdf?src-supplier=Digi-Key, ComponentLink1URL=https://datasheet.ciiva.com/940/ao3401a-940720.pdf?src-supplier=Digi-Key, ComponentLink2Description=https://datasheet.ciiva.com/26927/getdatasheetpartid-79048-26927888.pdf?src-supplier=Verical, ComponentLink2URL=https://datasheet.ciiva.com/26927/getdatasheetpartid-79048-26927888.pdf?src-supplier=Verical, Lead Free="Lead Free", Mount="Surface Mount", Number of Elements=1, Number of Pins=3, Packaging="Cut Tape", Power Dissipation=1.4W, Pricing 1="1=0.44, 10=0.333, 100=0.2073, 500=0.1418, 1000=0.10908 (USD)", Radiation Hardening=No, Rds On Max=44mR, RoHS Compliant=Yes, Series=-, Stock 1=1131740, Supplier 1=Digi-Key
R1: library part "Tro 0603 5% 10k", "Dán", Chung_Loai=Dán, Don_Vi=Con, Ma_Hang=MH006316, So_Chan=2, Ten_Linh_Kien="Trở 0603 5% 10k"
R2: library part NTCG163JF103FT1, "THERMISTOR 10K OHM 1% 0603", Category=RESISTOR, CompanyID=VT-01145, MPN=NTCG163JF103FT1, Solder=SMT
R3 R7: library part "RES SMD 10K OHM 5% 1/10W 0603", "Surface Mount Thick Film Resistor, RC Series, 10 kohm, 100 mW, - 5%, 50 V, 0603 [1608 Metric]", Case Code (Imperial)=0603, Case Code (Metric)=1608, Manufacturer=Yageo, Manufacturer Part Number=RC0603JR-0710KL, Max Operating Temperature=155°C, Max Power Dissipation=100mW, Min Operating Temperature=-55°C, Resistance=10kR, Resistor Type="Thick Film", Supplier Part Number 1=311-10KGRCT-ND, Temperature Coefficient=100ppm/°C, Tolerance=5%, Voltage Rating=50V, Case/Package=0603, ComponentLink1Description=http://www.yageo.com/documents/recent/PYu-RC_Group_51_RoHS_L_10.pdf?src-supplier=Digi-Key, ComponentLink1URL=http://www.yageo.com/documents/recent/PYu-RC_Group_51_RoHS_L_10.pdf?src-supplier=Digi-Key, Contact Plating=Tin,Matte, Depth=0.8mm, Features="Moisture Resistant", Height - Seated (Max)=0.022inch, Lead Free="Lead Free", Length=0.063inch, Military Standard=Not, Number of Pins=2, Number of Terminations=2, Packaging="Tape and Reel", Power Rating=100mW, Pricing 1="1=0.1, 10=0.02, 100=0.008, 1000=0.0036, 2500=0.00312 (USD)", Radiation Hardening=No, REACH SVHC=Unknown, RoHS Compliant=Yes, Stock 1=10996894, Supplier 1=Digi-Key, Termination=SMD/SMT, Voltage Rating (DC)=50V, Width=0.031inch
R4: library part "RES SMD 0.2 OHM 5% 1W 2512", "Surface Mount Thick Film Resistor, RC Series, 10 kohm, 1W, - 5%, 50 V, 2512", Case Code (Imperial)=6332, Case/Package=2512, Manufacturer=Yageo, Manufacturer Part Number=RC0603JR-0710KL, Max Operating Temperature=155°C, Max Power Dissipation=1W, Min Operating Temperature=-55°C, Power Rating=100mW, Resistance=10kR, Resistor Type="Thick Film", Supplier Part Number 1=311-10KGRCT-ND, Temperature Coefficient=100ppm/°C, Tolerance=5%, Voltage Rating=50V, Case Code (Metric)=6332, ComponentLink1Description=http://www.yageo.com/documents/recent/PYu-RC_Group_51_RoHS_L_10.pdf?src-supplier=Digi-Key, ComponentLink1URL=http://www.yageo.com/documents/recent/PYu-RC_Group_51_RoHS_L_10.pdf?src-supplier=Digi-Key, Contact Plating=Tin,Matte, Depth=0.8mm, Features="Moisture Resistant", Height - Seated (Max)=0.022inch, Lead Free="Lead Free", Length=0.063inch, Military Standard=Not, Number of Pins=2, Number of Terminations=2, Packaging="Tape and Reel", Pricing 1="1=0.1, 10=0.02, 100=0.008, 1000=0.0036, 2500=0.00312 (USD)", Radiation Hardening=No, REACH SVHC=Unknown, RoHS Compliant=Yes, Stock 1=10996894, Supplier 1=Digi-Key, Termination=SMD/SMT, Voltage Rating (DC)=50V, Width=0.031inch
R5: library part "Tro 0805 5% 560R", "Dán", Chung_Loai=Dán, Don_Vi=Con, Ma_Hang=MH005261, So_Chan=2, Ten_Linh_Kien="Trở 0805 5% 560R"
R6: library part "RES SMD 1.8M OHM 5% 1/8W 0805", "Res Thick Film 0805 1.8M Ohm 5% 1/8W ±100ppm/°C Molded SMD SMD Paper T/R", Case Code (Imperial)=0805, Case Code (Metric)=2012, Manufacturer=Yageo, Manufacturer Part Number=RC0805JR-071M8L, Max Operating Temperature=155°C, Max Power Dissipation=125mW, Min Operating Temperature=-55°C, Package Quantity=1, Resistance=1.8MR, Resistor Type="Thick Film", Supplier Part Number 1=311-1.8MARDKR-ND, Temperature Coefficient=100ppm/°C, Tolerance=5%, Voltage Rating=150V, Case/Package=0805, ComponentLink1Description=http://www.yageo.com/documents/recent/PYu-RC_Group_51_RoHS_L_9.pdf?src-supplier=Digi-Key, ComponentLink1URL=http://www.yageo.com/documents/recent/PYu-RC_Group_51_RoHS_L_9.pdf?src-supplier=Digi-Key, ComponentLink2Description=https://www.yageo.com/upload/media/product/productsearch/datasheet/rchip/PYu-RC_Group_51_RoHS_L_10.pdf?src-supplier=Digi-Key, ComponentLink2URL=https://www.yageo.com/upload/media/product/productsearch/datasheet/rchip/PYu-RC_Group_51_RoHS_L_10.pdf?src-supplier=Digi-Key, Construction=Rectangular, Contact Plating=Tin,Matte, Depth=1.25mm, Features="Moisture Resistant", Height=0.5mm, Lead Free="Lead Free", Length=2mm, Military Standard=Not, Number of Terminations=2, Packaging="Tape and Reel", Power Rating=125mW, Pricing 1="1=0.1, 10=0.036, 100=0.0145, 1000=0.00652, 2500=0.00566 (USD)", Radiation Hardening=No, RoHS Compliant=Yes, Series=RC, Size Code=0805, Stock 1=11875, Supplier 1=Digi-Key, Termination=SMD/SMT, Voltage Rating (DC)=150V, Width=1.25mm
R8 R10 R11 R12 R13 R14 R15 R19: library part "Tro 0805 5% 3.3k", "Dán", Chung_Loai=Dán, Don_Vi=Con, Ma_Hang=MH005305, So_Chan=2, Ten_Linh_Kien="Trở 0805 5% 3.3k"
R9 R18 R20 R21: library part "Tro 0603 1% 1k", "Dán", Chung_Loai=Dán, Don_Vi=Con, Ma_Hang=MH006334, So_Chan=2, Ten_Linh_Kien="Trở 0603 1% 1k"
R16 R17: library part "Tro 0805 5% 10k", "Dán", Chung_Loai=Dán, Don_Vi=Con, Ma_Hang=MH005239, So_Chan=2, Ten_Linh_Kien="Trở 0805 5% 10k"
S1: "Slide Switch SPDT Through Hole", Package=None, Availability=Unavailable, MP=500SSP1S2M2QEA, Price=None
U1: "2A-switch buck 8.4V / 4.2V rechargeable lithium battery", Package=Package, Availability="Not in stock", Check_prices=https://www.snapeda.com/parts/TP5100/NanJing+Top+Power+ASIC+Corp./view-part/?ref=eda, MF="NanJing Top Power ASIC Corp.", MP=TP5100, Price=None, SnapEDA_Link=https://www.snapeda.com/parts/TP5100/NanJing+Top+Power+ASIC+Corp./view-part/?ref=snap
U3: "Dual standard operational amplifier 8-SOIC 0 to 70", Package="SOIC-8 Texas Instruments", Availability=Good, Check_prices=https://www.snapeda.com/parts/LM358DRE4/Texas%20Instruments/view-part/544216/?ref=eda, MF="Texas Instruments", MP=LM358DRE4, Price=None, Purchase-URL=https://pricing.snapeda.com/search/part/LM358DRE4/?ref=eda, SnapEDA_Link=https://www.snapeda.com/parts/LM358DRE4/Texas%20Instruments/view-part/544216/?ref=snap
U4: "Dual core, Wi-Fi: 2.4 GHz up to 150 Mbits/s,BLE (Bluetooth Low Energy) and legacy Bluetooth, 32 bits, Up to 240 MHz", Package=None, Availability="Not in stock", Check_prices=https://www.snapeda.com/parts/ESP32-DEVKIT-V1/Do+it/view-part/?ref=eda, MF="Do it", MP=ESP32-DEVKIT-V1, Price=None, SnapEDA_Link=https://www.snapeda.com/parts/ESP32-DEVKIT-V1/Do+it/view-part/?ref=snap
U5: "5.5V to 36V Input, 3A, 500kHz Step-Down Converter", Package="HSOIC-8 Texas Instruments", Availability="In Stock", Check_prices=https://www.snapeda.com/parts/TPS5430DDAR/Texas+Instruments/view-part/?ref=eda, MF="Texas Instruments", MP=TPS5430DDAR, Price=None, Purchase-URL=https://pricing.snapeda.com/search/part/TPS5430DDAR/?ref=eda, SnapEDA_Link=https://www.snapeda.com/parts/TPS5430DDAR/Texas+Instruments/view-part/?ref=snap
BT1: Ma_Hang=MH001036, Ten="Nút Nhấn 2 Chân 3x6x2.5MM SMD"

## Free pads (board coordinates)
  round 1.524 hole 2 mask+0.102: 3(2.413,67.056) 4(2.413,2.54) 5(96.647,2.794) 6(96.647,67.437)

## Via types
v1: diameter 0.7, hole 0.3, Top Layer to Bottom Layer, tented both sides, 33 vias
v2: diameter 0.7, hole 0.3, Top Layer to Bottom Layer, 12 vias

## Nets (pads, with @x,y where several pads share a name; then routed paths per layer and width w, separated by ;. In a path a pad name is that pad's centre, name@x,y a point inside that pad or via, vN(x,y) a via of type N, cw(c..) or ccw(c..) an arc to the next point about the centre after c; other vN are vias at no path point)
1OUT: R8.1 R13.2 U3.1 | length 12
  Top Layer w0.5: R13.2 87.372,50.347 88.9,51.875 U3.1 88.95,53.437 88.95,54.181 90.227,55.457 R8.1
2OUT: C18.2 R15.2 TP1.1 U3.7 U4.3 | length 18.5
  Top Layer w0.5: U4.3 86.244,41.413 87.695,42.864 C18.2@87.695,44.082 ; U3.7 87.663,48.414 87.663,46.063 R15.2 C18.2 C18.2@87.695,44.082 ; TP1.1 90.932,43.942 87.836,43.942 C18.2@87.695,44.082
+3.7V: C10.1 C15.2 L2.2 MH1.1 U2.6 | length 19.6
  Top Layer w0.5: v1(33.7,17.95) 33.738,17.912 34.57,17.912 34.61,17.872 U2.6 ; v1(41.125,14.95) 41.179,14.95 41.281,14.848 L2.2 45.984,14.848 48.502,12.33 49.255,12.33 MH1.1
  Bottom Layer w0.5: v1(33.7,17.95) 33.725,17.925 38.15,17.925 v1(41.125,14.95)
+5V: A1.1 C16.1 C22.1 L3.2 R17.2 TP2.1 U3.8 U4.30 | length 30.4
  Top Layer w1: L3.2 46.228,50.719 50.454,46.493 U4.30 ; C22.1 50.404,54.854 52.35,56.8 TP2.1 ; C16.1 90.932,48.694 90.932,50.927 93.472,53.467 A1.1
+V_pin: D2.2 D6.1 Q1.2 | length 9
  Bottom Layer w1: Q1.2 16.18,33.981 16.18,35.668 D2.2 16.714,36.134 22.291,36.134 D6.1
BAT: C5.2 C6.2 C10.2 C12.2 C13.2 Pin1.2 Q1.3 R4.1 U1.9 U2.5 | length 10.2
  Bottom Layer w1: Pin1.2 14.63,30.114 Q1.3
BUZZ: R9.2 U4.14 | length 4.4
  Top Layer w0.5: U4.14 78.928,13.411 83.114,13.411 R9.2
CS: R1.2 U1.13 | length 4
  Top Layer w0.3: U1.13 30.957,25.482 30.957,26.082 31.481,26.606 32.181,26.606 32.651,27.076 R1.2
GND: A1.3 BT1.1 C1.1 C2.1 C3.1 C4.2 C5.1 C6.1 C7.1 C8.1 C9.1 C12.1 C13.1 C14.1 C15.1 C16.2 C17.2 C20.2 C21.2 C22.2 C23.1 D1.1 D7.1 D8.2 D9.2 D10.2 J1.2 LS1.2 Pin1.1 R2.2 R5.1 R7.1 R11.2 R14.2 R19.1 TP3.1 U1.7 U1.12 U1.17 U2.2 U3.4 U4.2 U4.29 U5.6 U5.9 U5.10 U5.11 U5.12 U5.13 U5.14 U5.15 U5.16 U5.17 | length 88.2
  Top Layer w0.3: v1(30.05,20.6) 30.05,20.708 30.287,20.945 30.287,21.742 U1.7 ; U1.12 32.714,24.587 32.998,24.871 32.998,24.998 v1(33.075,25.075)
  Top Layer w0.5: v1(29.4,23) U1.17@29.4,23.04 ; U5.6 32.387,51.203 33.603,51.203 33.75,51.057 33.75,50.764 34.042,50.764 34.188,50.618 U5.9 ; v1(32.675,4.025) 32.675,4.079 32.75,4.154 C5.1 ; U2.2 35.565,15.113 35.565,14.21 36.131,13.644 36.131,13.395 C14.1 36.304,13.222 37.503,13.222 v1(37.525,13.2) ; R7.1 37.499,11.547 37.571,11.475 v1(37.625,11.475) ; C6.1 42.509,10.705 43.745,10.705 v1(43.75,10.7) ; C15.1 45.933,12.311 46.781,11.463 46.962,11.463 v1(47,11.425) ; U3.4 85.095,53.392 85.095,55.045 v1(85.1,55.05) ; R11.2 90.235,58.764 91.908,60.437 92.037,60.437 v1(92.075,60.475)
  Top Layer w1: R19.1 40.374,56.627 42.101,58.354 C22.2 ; v1(82.125,46.025) 83.75,46.025 R14.2 ; C16.2 92.794,48.619 94.206,48.619 v1(94.225,48.6) 96.012,50.387 A1.3
  Bottom Layer w0.3: C4.2 38.188,27.51 R2.2
  Bottom Layer w0.5: LS1.2 92.375,20.356 92.375,22.461 D10.2 D9.2 D8.2
  Bottom Layer w1: Pin1.1 8.001,33.278 9.645,34.922 9.645,35.022 9.745,35.122 R5.1 ; BT1.1 45.301,36.574 C23.1 ; U4.29 U4.2
  other v1: 37.75,21.025 37.7,22.15 30.55,23 37.7,23.25 29.4,24.225 30.55,24.225 22.225,27.875 23.3,27.875 36.075,57.15 37.925,57.15
  other v2: 29.475,18.275 25.325,18.3 25.35,19.15 29.5,19.15 26.5,19.275 28.225,19.275
LX: D1.2 L1.1 U1.2 U1.3
NetA1_2: A1.2 R10.1 R12.2 | length 8.9
  Bottom Layer w1: R12.2 90.358,59.228 90.358,56.956 R10.1 93.909,56.952 94.729,57.772 94.729,59.653 A1.2
NetC11_1: C11.1 U2.3 | length 2
  Top Layer w0.5: U2.3 36.51,15.36 36.55,15.4 38.181,15.4 C11.1
NetC11_2: C11.2 L2.1 U2.4 | length 12.8
  Top Layer w0.5: U2.4 36.51,17.313 36.777,17.046 C11.2 38.227,19.051 43.424,24.248 L2.1
NetC14_2: C14.2 R7.2 U2.1 | length 3.6
  Top Layer w0.5: U2.1 34.621,15.106 34.621,11.558 R7.2
NetC17_1: C17.1 R12.1 | length 2.4
  Bottom Layer w1: R12.1 C17.1
NetC18_1: C18.1 R14.1 R15.1 U3.6 | length 6.6
  Top Layer w0.5: R14.1 83.78,44.156 85.769,44.156 C18.1 R15.1 85.795,46.13 86.36,46.695 U3.6
NetC19_1: C19.1 U5.1 | length 2.6
  Top Layer w0.5: U5.1 37.787,48.763 40.204,48.763 C19.1
NetC19_2: C19.2 D7.2 L3.1 U5.8
NetD2_1: D2.1 Q1.1 R5.2 | length 6.4
  Bottom Layer w1: R5.2 11.876,37.022 D2.1 13.23,35.668 13.23,33.786 Q1.1
NetD3_1: D3.1 D4.1 R6.1 | length 3.2
  Top Layer w0.5: R6.1 28.179,29.229 31.188,29.229 D4.1
NetD3_2: D3.2 U1.15 | length 2.3
  Top Layer w0.3: U1.15 29.647,27.347 D3.2
NetD4_2: D4.2 U1.14 | length 2.6
  Top Layer w0.3: U1.14 30.297,26.472 30.992,27.167 30.992,27.434 D4.2
NetD5_2: D5.2 D6.2 S1.2
NetD8_1: D8.1 R18.2 | length 4.9
  Bottom Layer w0.5: R18.2 88.307,26.66 88.688,26.279 D8.1
NetD9_1: D9.1 R20.2 | length 4.8
  Bottom Layer w0.5: R20.2 D9.1
NetD10_1: D10.1 R21.2 | length 5.2
  Bottom Layer w0.5: R21.2 86.037,21.625 88.35,21.625 89.194,22.469 D10.1
NetLS1_1: LS1.1 R9.1 | length 8.1
  Top Layer w0.5: R9.1 83.25,11.775 85.675,11.775 86.03,11.42 LS1.1
NetR8_2: R8.2 R11.1 U3.2 | length 5.6
  Top Layer w0.5: U3.2 87.63,54.991 88.174,55.535 88.174,56.54 R8.2 88.331,56.697 88.331,58.659 R11.1
NetR10_2: R10.2 U3.3 | length 5.4
  Top Layer w0.5: v1(86.325,55.575) 86.342,55.557 86.342,53.404 U3.3
  Bottom Layer w0.5: v1(86.325,55.575) 86.363,55.613 86.363,56.402 86.885,56.924 88.426,56.924 R10.2
NetR13_1: R13.1 U3.5 | length 2.2
  Top Layer w0.5: R13.1 U3.5
NetR16_1: R16.1 U5.5 | length 3.1
  Top Layer w0.5: v1(31.025,52.625) 31.079,52.625 31.131,52.573 32.287,52.573 U5.5
  Bottom Layer w0.5: R16.1 29.752,51.608 30.73,52.587 30.987,52.587 v1(31.025,52.625)
NetR17_1: R17.1 R19.2 U5.4 | length 4.6
  Top Layer w0.5: U5.4 37.787,52.573 40.096,52.573 R17.1
  Top Layer w1: R17.1 R19.2
START: BT1.2 C23.2 U4.28 | length 9.2
  Bottom Layer w1: C23.2 46.901,36.326 BT1.2 51.796,41.221 53.276,41.221 U4.28
STATUS_1: R18.1 U4.9 | length 5.8
  Bottom Layer w0.5: U4.9 81.598,26.173 82.085,26.66 R18.1
STATUS_2: R20.1 U4.10 | length 5.9
  Bottom Layer w0.5: U4.10 81.608,23.633 82.349,24.374 R20.1
STATUS_3: R21.1 U4.11 | length 5.8
  Bottom Layer w0.5: U4.11 81.693,21.093 82.307,21.707 R21.1
TS: C4.1 R2.1 R3.1 U1.11 | length 7.9
  Top Layer w0.3: U1.11 33.412,23.937 33.988,24.513 34.391,24.513 34.652,24.774 34.652,26.514 C4.1
  Bottom Layer w0.3: C4.1 36.088,27.95 36.088,28.342 36.438,28.692 R2.1
V_Adap: C7.2 C8.2 C9.2 D5.1 J1.1 R6.2 U1.1 U1.4 U1.5 U1.16 | length 9
  Bottom Layer w0.5: v2(25.125,21.9) 25.125,30.321 25.5,30.696 v1(25.5,30.75)
  other v1: 26.6,21.875 24.35,31.775 18.575,44.875 17.525,45.825 18.55,46.7
  other v2: 25.95,20.6 27.175,20.625 28.4,20.625 26.575,31.75 25.45,32.75
Vin: C20.1 C21.1 R16.2 S1.1 U5.7 | length 2.6
  Bottom Layer w0.5: R16.2 29.663,49.697 29.663,47.162 v1(29.675,47.15)
VREG: C3.2 R1.1 R3.2 U1.10 | length 9.8
  Top Layer w0.3: U1.10 34.577,23.287 C3.2 34.633,23.281 34.883,23.531 35.009,23.531 35.933,24.455 35.983,24.455 36.233,24.705 R3.2 36,24.988 36,26.95 34.964,27.986 34.476,27.986 R1.1
VS: C1.2 C2.2 L1.2 R4.2 U1.8 | length 10.5
  Top Layer w0.3: R4.2 27.287,14.225 28.775,14.225 30.947,16.397 U1.8
pads on no net: J1.3 S1.3 U1.6 U4. U4.1 U4.4 U4.5 U4.6 U4.7 U4.8 U4.12 U4.13 U4.15 U4.16 U4.17 U4.18 U4.19 U4.20 U4.21 U4.22 U4.23 U4.24 U4.25 U4.26 U4.27 U5.2 U5.3

## Polygon pours and split planes (outlines as drawn)
GND on Bottom Layer "GND_L02_P034" (solid, pour order 34): 0,0 98.925,0 98.925,69.725 0.175,69.725 0,69.9
V_Adap on Bottom Layer "V_ADAP_L02_P029" (solid, pour order 29): 23.625,31.225 23.625,32.2 24.95,33.525 26,33.525 27.175,32.35 27.175,22.8 29.2,20.775 29.2,20.075 28.975,19.85 25.75,19.85 24.175,21.425 24.175,30.65
NetD5_2 on Bottom Layer "NETD5_2_L02_P008" (solid, pour order 8): 20.95,53.075 23.475,53.075 23.925,52.625 23.925,41.85 24.5,41.275 28.225,41.275 28.825,40.675 28.825,39.425 28.7,39.3 24.3,39.3 24,39 21.275,39 21.275,48.475 20.9,48.85
V_Adap on Bottom Layer "V_ADAP_L02_P000" (solid, pour order 0): 13.812,53.307 19.4,53.307 19.4,44.325 18.669,43.594 13.812,43.594
GND on Top Layer "GND_L01_P010" (solid, pour order 10): 26.6,51.025 26.675,50.95 33.1,50.95 33.125,50.975 33.125,51.55 33.1,51.575 31.1,51.575 30.425,52.25 26.6,52.25
GND on Top Layer "GND_L01_P035" (solid, pour order 35): 24.925,19.325 25.25,19.65 29.625,19.65 29.925,19.35 29.925,18.075 29.75,17.9 25.125,17.9 24.925,18.1
V_Adap on Top Layer "V_ADAP_L01_P032" (solid, pour order 32): 28.375,22.8 28.6,22.8 28.625,22.775 28.625,22.4 28.75,22.275 29.125,22.275 29.175,22.225 29.175,20.075 29,19.9 25.75,19.9 24.2,21.45 24.2,22.575 24.4,22.8
VS on Top Layer "VS_L01_P027" (solid, pour order 27): 17.375,11.675 17.388,11.688 17.388,15.238 19.6,17.45 29.125,17.45 29.125,16.3 28.35,15.525 28.35,12.5 27.975,12.125 26.1,12.125 25.75,12.475 25.75,16.2 25.5,16.45 23.8,16.45 22.5,15.15 22.5,11.675
+5V on Top Layer "+5V_L01_P024" (solid, pour order 24): 51.675,49.45 71.025,49.45 85,63.425 92.05,63.425 92.85,62.625 92.85,58.825 93.15,58.525 93.925,58.525 94.025,58.625 94.025,67.575 93.25,68.35 58.025,68.35 50.025,60.35 50.025,56.975 49.075,56.025 49.15,55.95 49.15,49.475
+5V on Top Layer "+5V_L01_P023" (solid, pour order 23): 39.575,51.45 42.65,51.45 43.6,52.4 43.6,55.625 44.075,56.1 52.1,56.1 52.1,49.425 43.275,49.425 42.45,50.25 39.575,50.25
GND on Top Layer "GND_L01_P022" (solid, pour order 22): 35.85,19.55 35.8,19.6 35.8,23.675 35.925,23.8 38.2,23.8 38.3,23.7 38.3,20.75 37.1,19.55
BAT on Top Layer "BAT_L01_P021" (solid, pour order 21): 4.4,24.225 5.7,25.525 10.025,25.525 11.95,23.6 11.95,11.375 12.65,10.675 30.7,10.675 32.025,12 32.025,12.075 33.5,12.075 33.5,10.775 33.8,10.475 39.8,10.475 40.3,10.975 40.3,12.95 40.35,13 41.35,13 41.425,12.925 41.425,6.625 41.125,6.325 6.225,6.325 4.4,8.15
BAT on Top Layer "BAT_L01_P020" (solid, pour order 20): 35.25,17.075 35.325,17 35.825,17 35.852,17.027 35.852,18.833 35.225,19.46 35.225,22.225 33.625,22.225 33.05,22.8 31.325,22.8 31.325,21 32.025,20.3 32.025,12.025 33.5,12.025 33.5,18.575 34.9,18.575 35.25,18.225
+3.7V on Top Layer "+3.7V_L01_P019" (solid, pour order 19): 42.075,11.875 44.775,11.875 44.775,12.9 45.425,13.55 47.275,13.55 47.275,16.15 47.225,16.2 42.175,16.2 42.125,16.15
GND on Top Layer "GND_L01_P018" (solid, pour order 18): 25.2,24.425 25.2,28.375 25.15,28.425 24.35,28.425 21.675,28.425 21.675,24.75 22,24.425
LX on Top Layer "LX_L01_P017" (solid, pour order 17): 17.4,26.6 17.75,26.925 19.75,26.925 19.875,26.8 19.875,24.6 20.525,23.95 27.2,23.95 27.375,24.125 28.575,24.125 28.625,24.075 28.625,23.15 28.6,23.125 24.15,23.125 22.575,21.55 22.575,21.025 17.35,21.025 17.325,21.05 17.4,21.125
V_Adap on Top Layer "V_ADAP_L01_P014" (solid, pour order 14): 25.825,28.2 25.825,28.525 13.7,40.65 13.7,53.325 16.125,53.325 17.05,52.4 17.05,49.025 19.4,46.675 19.4,41.925 27.15,34.175 27.15,28.2
V_Adap on Top Layer "V_ADAP_L01_P012" (solid, pour order 12): 28.625,24.4 28.625,24.8 28.8,24.975 29.175,24.975 29.175,27.65 28.85,27.975 27.4,27.975 26.825,28.55 25.8,28.55 25.8,24.4 25.925,24.275 27.125,24.275 27.25,24.4
Vin on Top Layer "VIN_L01_P009" (solid, pour order 9): 26.525,50.375 26.55,50.4 33.1,50.4 33.125,50.375 33.125,49.675 33.075,49.625 31.425,49.625 30.5,48.45 30.5,41.75 26.45,41.75 26.425,41.725 26.425,50.3
GND on Top Layer "GND_L01_P007" (solid, pour order 7): 36.525,48.125 37.475,47.175 37.475,44.475 35.375,44.475 35.325,44.525 35.325,46 33.575,47.75 33.575,57.025 38.175,61.625 45.925,61.625 48.225,59.325 48.225,57.45 47.65,56.875 42.125,56.875 41.2,55.95 36.975,55.95 36.5,55.475
NetC19_2 on Top Layer "NETC19_2_L01_P005" (solid, pour order 5): 31.525,49 31.55,49.025 33.1,49.025 33.125,49 33.125,47.2 33.575,46.75 33.575,44 33.8,43.775 39,43.775 39.4,44.175 39.4,47.575 46.725,47.575 47.3,47 47.3,42.35 46.75,41.8 31.2,41.8 31.2,48.55
NetR17_1 on Top Layer "NETR17_1_L01_P004" (solid, pour order 4): 36.95,52.2 37.025,52.125 40.975,52.125 40.975,55.325 40.95,55.35 37.625,55.35 36.95,54.675
+5V on Top Layer "+5V_L01_P002" (solid, pour order 2): 88.6,47.5 88.65,47.45 91.375,47.45 91.475,47.55 91.475,51.025 90.5,51.025 90.2,50.725 88.85,50.725 88.6,50.475

## Keep-outs
Keep-Out Layer:
  the board outline again, w0.254

## Text inside footprints (layer, text, board x,y; h text height)
C22: Top Overlay "+" at 45.128,54.304 h0.75 r90
LS1: Top Overlay "+" at 91.783,12.829 h0.75 r90